# EAGLE board temp v2 (EAGLE 9.7.0)
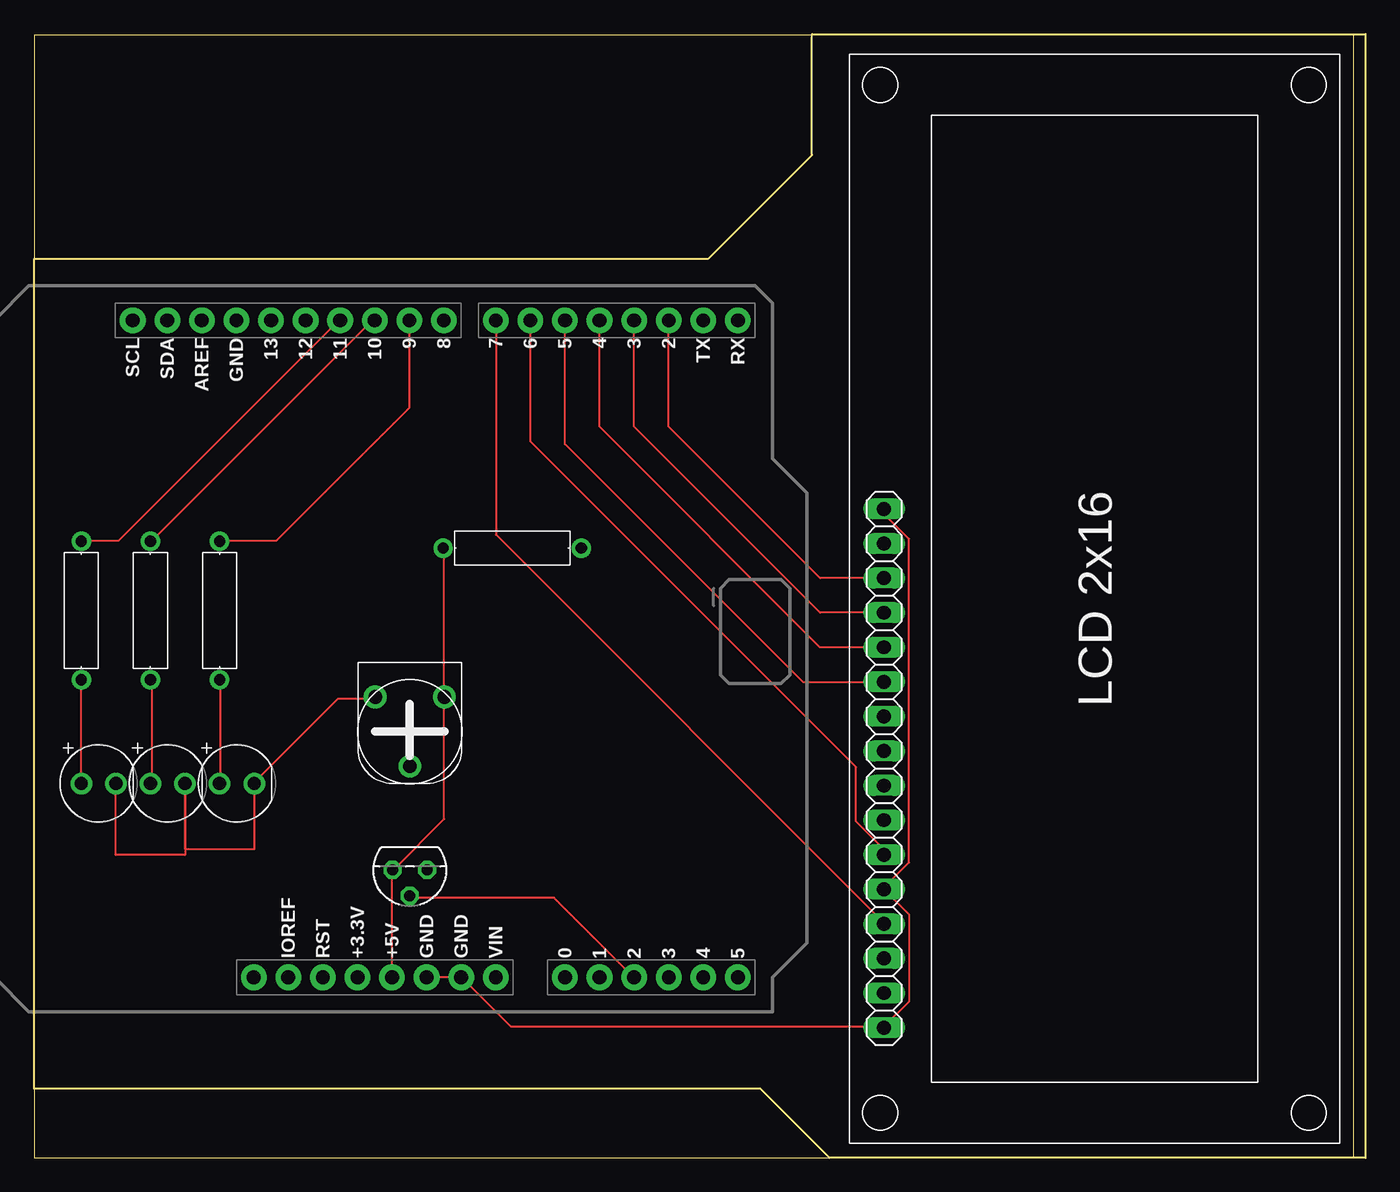
[diagram p0: board, top side]
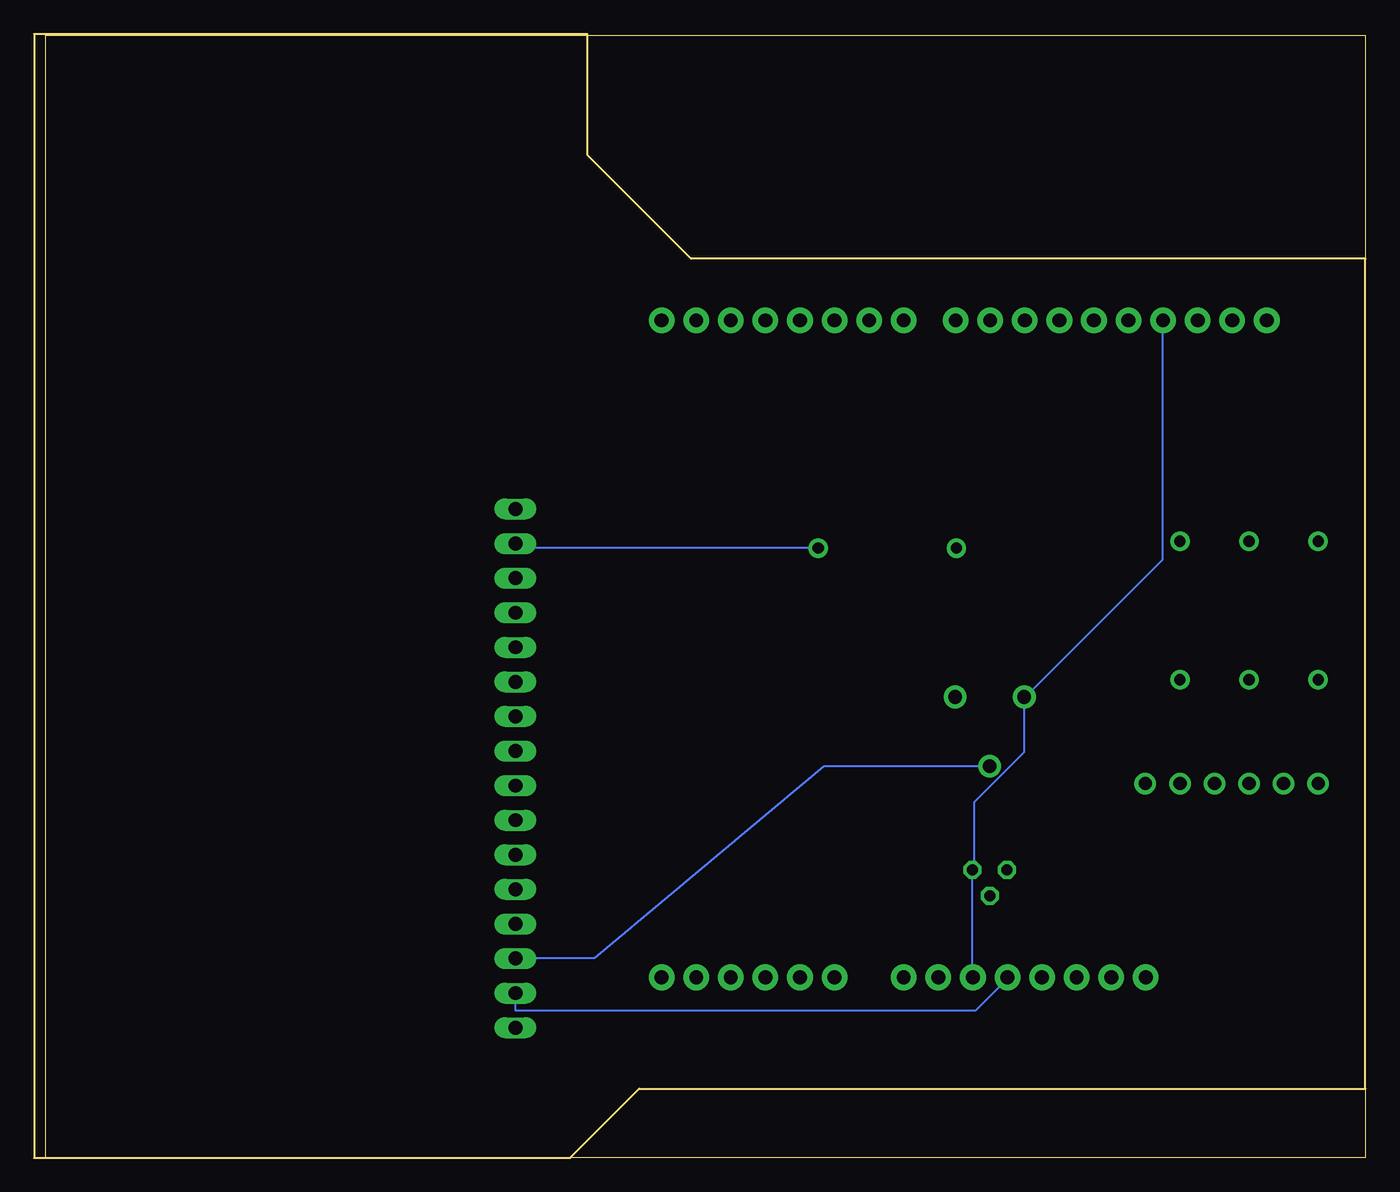
[diagram p1: board, bottom side, seen from below]

Size 97.79 x 82.55 mm. Coordinates in mm from the lower left corner, seen from the top.
Outline: 0,66.04 0,82.48 96.94,82.48 96.94,0 0,0 0,5.08
Outline: 0,66.04 49.53,66.04 57.15,73.66 57.15,82.55 97.79,82.55 97.79,0 58.42,0 53.34,5.08 0,5.08
Outline: 0,5.08 0,66.04
Copper layers (1*16): Top 0.035mm / dielectric 1.5mm / Bottom 0.035mm
Design rules "default": minimum track width 6mil, minimum drill 0.35mm, track to track 6mil, track to pad 6mil, pad to pad 6mil, via to via 6mil, smd to smd 6mil, copper to edge 40mil, drill to drill 6mil, minimum pad ring 10mil, minimum via ring 8mil, stop-mask expansion 4mil, vias tented up to drill 0mil, thermal gap 10mil

## Footprints (pad centres in the part's own frame; a part is rotated, then mirrored left to right if it is on the bottom)
LEDRD254W60D565H860B = drill 0.981 pad 1.581: 1 -1.27,0; 2 1.27,0
LEDRD254W60D565H860B_G = drill 0.981 pad 1.581: 1 -1.27,0; 2 1.27,0
LEDRD254W60D565H860B_Y = drill 0.981 pad 1.581: 1 -1.27,0; 2 1.27,0
RESAD1016W63L850D250B = drill 0.83 pad 1.43: 1 -5.08,0; 2 5.08,0
HA-06-SM065 = drill 1 pad 1.676: 1 -2.54,-2.54; 2 0,2.54; 3 2.54,-2.54
ARDUINO-UNO-R3-SHIELD = drill 1.016 pad 1.88: 3.3V 24.13,-2.54; 5V 24.13,0; A0 24.13,12.7; A1 24.13,15.24; A2 24.13,17.78; A3 24.13,20.32; A4 24.13,22.86; A5 24.13,25.4; AREF -24.13,-13.97; D2 -24.13,20.32; D3 -24.13,17.78; D4 -24.13,15.24; D5 -24.13,12.7; D6 -24.13,10.16; D7 -24.13,7.62; D8 -24.13,3.81; D9 -24.13,1.27; D10 -24.13,-1.27; D11 -24.13,-3.81; D12 -24.13,-6.35; D13 -24.13,-8.89; GND@0 24.13,2.54; GND@1 24.13,5.08; GND@2 -24.13,-11.43; IOREF 24.13,-7.62; NC 24.13,-10.16; RES 24.13,-5.08; RX -24.13,25.4; SCL -24.13,-19.05; SDA -24.13,-16.51; TX -24.13,22.86; VIN 24.13,7.62
JHD-162A = drill 1.016 long: 1 -19.05,0; 2 -16.51,0; 3 -13.97,0; 4 -11.43,0; 5 -8.89,0; 6 -6.35,0; 7 -3.81,0; 8 -1.27,0; 9 1.27,0; 10 3.81,0; 11 6.35,0; 12 8.89,0; 13 11.43,0; 14 13.97,0; 15 16.51,0; 16 19.05,0
TO92 = drill 0.813 octagon: 1 -1.27,0; 2 0,1.905; 3 1.27,0

## Placement (x,y rotation side)
D1  RED  [LEDRD254W60D565H860B]  14.9,27.5 0 top
D2  GREEN  [LEDRD254W60D565H860B_G]  9.82,27.5 0 top
D3  YELLOW  [LEDRD254W60D565H860B_Y]  4.74,27.5 0 top
R2  220  [RESAD1016W63L850D250B]  35.12,44.79 0 top
R3  200  [RESAD1016W63L850D250B]  13.63,40.2 270 top
R4  200  [RESAD1016W63L850D250B]  8.55,40.2 270 top
R5  200  [RESAD1016W63L850D250B]  3.47,40.2 270 top
RPOT2  250k  [HA-06-SM065]  27.6,31.31 180 top
U3  ARDUINO-UNO-R3-SHIELD  [ARDUINO-UNO-R3-SHIELD]  26.29,37.39 270 top
U4  LCD-16X2JHD-162A  [JHD-162A]  62.43,28.62 90 top
U5  TMP36GT9Z_TO92  [TO92]  27.6,21.15 180 top

## Library data of the parts
D1 = Tinkercad; CATEGORY: Opto-Electronic; SUB-CATEGORY: LED; VALUE: LED_RED
D2 = Tinkercad; CATEGORY: Opto-Electronic; SUB-CATEGORY: LED; VALUE: LED_GREEN
D3 = Tinkercad; CATEGORY: Opto-Electronic; SUB-CATEGORY: LED; VALUE: LED_YELLOW
R2-R5 RPOT2 U3-U5 = Tinkercad

## Nets
D1_A: D1.1 R3.2
D2_A: D2.1 R4.2
D3_A: D3.1 R5.2
U3_5V: R2.1 RPOT2.1 U3.5V U4.2 U5.3
U3_A2: U3.A2 U5.2
U3_D2: U3.D2 U4.14
U3_D3: U3.D3 U4.13
U3_D4: U3.D4 U4.12
U3_D5: U3.D5 U4.11
U3_D6: U3.D6 U4.6
U3_D7: U3.D7 U4.4
U3_D9: R3.1 U3.D9
U3_D10: R4.1 U3.D10
U3_D11: R5.1 U3.D11
U3_GND: D1.2 D2.2 D3.2 RPOT2.3 U3.GND@0 U3.GND@1 U3.GND@2 U4.1 U4.5 U4.16 U5.1
U4_LED+: R2.2 U4.15
U4_VO: RPOT2.2 U4.3

## Tracks (layer width: path | path; a pad name or v marks a point on that pad's centre or on a via)
D1_A
  Top 0.152: R3.2 13.66,35.1 13.66,27.63 D1.1
D2_A
  Top 0.152: R4.2 8.64,35.1 8.64,27.63 D2.1
D3_A
  Top 0.152: R5.2 3.45,35.1 3.45,27.63 D3.1
U3_5V
  Top 0.152: R2.1 30.12,44.7 30.12,33.88 RPOT2.1 30.12,33.73 30.12,24.89 26.47,21.23 U5.3 26.31,21.08 26.31,13.31 U3.5V
  Bottom 0.152: U4.2 62.43,10.82 28.65,10.82 26.31,13.16 U3.5V
U3_A2
  Top 0.152: U5.2 27.69,19.1 38.2,19.1 43.99,13.31 U3.A2
U3_D2
  Top 0.152: U4.14 57.73,42.59 46.62,53.7 U3.D2
U3_D3
  Top 0.152: U4.13 57.73,40.05 44.08,53.7 U3.D3
U3_D4
  Top 0.152: U3.D4 41.53,53.7 57.73,37.5 U4.12
U3_D5
  Top 0.152: U3.D5 39,52.43 56.46,34.96 U4.11
U3_D6
  Top 0.152: U3.D6 36.45,52.63 60.38,28.71 60.38,24.7 62.43,22.64 U4.6
U3_D7
  Top 0.152: U4.4 62.43,17.27 33.93,45.77 33.93,61.47 U3.D7
U3_D9
  Top 0.152: R3.1 13.66,45.31 17.78,45.31 27.53,55.07 27.53,61.47 U3.D9
U3_D10
  Top 0.152: R4.1 8.64,45.31 24.94,61.62 U3.D10
U3_D11
  Top 0.152: R5.1 3.61,45.31 6.2,45.31 22.35,61.47 U3.D11
U3_GND
  Top 0.152: 62.43,9.65 64.26,11.48 64.26,17.88 62.43,19.71 U4.5 62.43,19.86 64.26,21.69 64.26,45.47 62.43,47.3 U4.16 | U3.GND@0 28.9,13.31 31.34,13.31 U3.GND@1 31.5,13.16 35,9.65 62.43,9.65 | RPOT2.3 24.94,33.73 22.35,33.73 16.26,27.63 D1.2 16.17,22.68 11.09,22.68 D2.2 11.09,22.25 6.01,22.25 D3.2 | 62.43,9.65 U4.1
  Bottom 0.152: U3.GND@0 28.9,13.31 28.9,21.08 U5.1 28.75,21.23 28.75,26.11 25.09,29.77 25.09,33.73 RPOT2.3 24.94,33.88 14.88,43.94 14.88,61.47 U3.GND@2
U4_LED+
  Bottom 0.152: R2.2 62.1,44.79 U4.15
U4_VO
  Bottom 0.152: U4.3 62.43,14.68 56.63,14.68 39.76,28.77 RPOT2.2